# EAGLE board Homework#1 (EAGLE 7.6.0)

Size 73.58 x 63.39 mm. Coordinates in mm from the lower left corner, seen from the top.
Outline: 0,0 56.82,0 56.82,53.33 0,53.33 0,0
Copper layers (1*16): Top 0.035mm / dielectric 1.5mm / Bottom 0.035mm
Design rules "default": minimum track width 10mil, minimum drill 24mil, track to track 8mil, track to pad 8mil, pad to pad 8mil, via to via 8mil, smd to smd 8mil, copper to edge 40mil, drill to drill 8mil, minimum pad ring 10mil, minimum via ring 8mil, stop-mask expansion 4mil, vias tented up to drill 0mil, thermal gap 10mil

## Footprints (pad centres in the part's own frame; a part is rotated, then mirrored left to right if it is on the bottom)
LED5MM = drill 0.813 octagon: A -1.27,0; K 1.27,0
0207/10 = drill 0.813 octagon: 1 -5.08,0; 2 5.08,0
TL1105 = drill 1 pad 1.676: 1 -2.25,3.25; 2 2.25,3.25; 3 -2.25,-3.25; 4 2.25,-3.25
ARDUINO_UNO = drill 1.016 pad 1.88: 0 63.5,50.8; 1 60.96,50.8; 2 58.42,50.8; 3 55.88,50.8; 3.3V 35.56,2.54; 4 53.34,50.8; 5 50.8,50.8; 5V 38.1,2.54; 6 48.26,50.8; 7 45.72,50.8; 8 41.656,50.8; 9 39.116,50.8; 10 36.576,50.8; 11 34.036,50.8; 12 31.496,50.8; 13 28.956,50.8; A0 50.8,2.54; A1 53.34,2.54; A2 55.88,2.54; A3 58.42,2.54; A4 60.96,2.54; A5 63.5,2.54; AREF 23.876,50.8; GND 26.416,50.8; GND. 43.18,2.54; GND.. 40.64,2.54; I/OREF 30.48,2.54; N/C 27.94,2.54; RESET 33.02,2.54; SCL 18.796,50.8; SDA 21.336,50.8; VIN 45.72,2.54 | hole 3.2: 66.04,7.62; 66.04,35.56; 15.24,50.8; 13.97,2.54

## Placement (x,y rotation side)
D1  [LED5MM]  5,35.48 0 top
D2  [LED5MM]  5,149.78 0 top  (outside the outline)
D3  [LED5MM]  5,22.78 0 top
D4  [LED5MM]  5,200.58 0 top  (outside the outline)
D6  [LED5MM]  5,86.28 0 top  (outside the outline)
D7  [LED5MM]  5,810.18 0 top  (outside the outline)
D8  [LED5MM]  5,213.28 0 top  (outside the outline)
D9  [LED5MM]  5,98.98 0 top  (outside the outline)
D10  [LED5MM]  5,225.98 0 top  (outside the outline)
D10  [LED5MM]  5,225.98 0 top  (outside the outline)
D11  [LED5MM]  5,238.68 0 top  (outside the outline)
D12  [LED5MM]  5,251.38 0 top  (outside the outline)
D13  [LED5MM]  5,822.88 0 top  (outside the outline)
D14  [LED5MM]  5,695.88 0 top  (outside the outline)
D14  [LED5MM]  5,695.88 0 top  (outside the outline)
D15  [LED5MM]  5,429.18 0 top  (outside the outline)
D15  [LED5MM]  5,429.18 0 top  (outside the outline)
D16  [LED5MM]  5,137.08 0 top  (outside the outline)
D17  [LED5MM]  5,289.48 0 top  (outside the outline)
D18  [LED5MM]  5,302.18 0 top  (outside the outline)
D19  [LED5MM]  5,314.88 0 top  (outside the outline)
D20  [LED5MM]  5,327.58 0 top  (outside the outline)
D21  [LED5MM]  5,340.28 0 top  (outside the outline)
D22  [LED5MM]  5,352.98 0 top  (outside the outline)
D23  [LED5MM]  5,187.88 0 top  (outside the outline)
D24  [LED5MM]  5,162.48 0 top  (outside the outline)
D25  [LED5MM]  5,365.68 0 top  (outside the outline)
D27  [LED5MM]  5,378.38 0 top  (outside the outline)
D28  [LED5MM]  5,391.08 0 top  (outside the outline)
D29  [LED5MM]  5,403.78 0 top  (outside the outline)
D30  [LED5MM]  5,416.48 0 top  (outside the outline)
D31  [LED5MM]  5,441.88 0 top  (outside the outline)
D32  [LED5MM]  5,454.58 0 top  (outside the outline)
D33  [LED5MM]  5,467.28 0 top  (outside the outline)
D34  [LED5MM]  5,479.98 0 top  (outside the outline)
D35  [LED5MM]  5,492.68 0 top  (outside the outline)
D36  [LED5MM]  5,505.38 0 top  (outside the outline)
D37  [LED5MM]  5,518.08 0 top  (outside the outline)
D38  [LED5MM]  5,530.78 0 top  (outside the outline)
D39  [LED5MM]  5,543.48 0 top  (outside the outline)
D41  [LED5MM]  5,556.18 0 top  (outside the outline)
D42  [LED5MM]  5,568.88 0 top  (outside the outline)
D43  [LED5MM]  5,581.58 0 top  (outside the outline)
D44  [LED5MM]  5,594.28 0 top  (outside the outline)
D45  [LED5MM]  5,606.98 0 top  (outside the outline)
D51  [LED5MM]  5,619.68 0 top  (outside the outline)
D52  [LED5MM]  5,632.38 0 top  (outside the outline)
D53  [LED5MM]  5,645.08 0 top  (outside the outline)
D54  [LED5MM]  5,657.78 0 top  (outside the outline)
D55  [LED5MM]  5,670.48 0 top  (outside the outline)
D56  [LED5MM]  5,683.18 0 top  (outside the outline)
D57  [LED5MM]  5,708.58 0 top  (outside the outline)
D58  [LED5MM]  5,721.28 0 top  (outside the outline)
D59  [LED5MM]  5,733.98 0 top  (outside the outline)
D60  [LED5MM]  5,746.68 0 top  (outside the outline)
D61  [LED5MM]  5,759.38 0 top  (outside the outline)
D62  [LED5MM]  5,772.08 0 top  (outside the outline)
D63  [LED5MM]  5,784.78 0 top  (outside the outline)
D64  [LED5MM]  5,797.48 0 top  (outside the outline)
D65  [LED5MM]  5,835.58 0 top  (outside the outline)
D66  [LED5MM]  5,848.28 0 top  (outside the outline)
R1  220‎Ω  [0207/10]  5,48.18 0 top
R2  220‎Ω  [0207/10]  5,60.88 0 top
R3  220‎Ω  [0207/10]  5,175.18 0 top  (outside the outline)
R4  220‎Ω  [0207/10]  5,276.78 0 top  (outside the outline)
S3  [TL1105]  5,73.58 0 top  (outside the outline)
U1  [ARDUINO_UNO]  5,10.08 0 top

## Library data of the parts
D1-D4 D6-D10 D10-D14 D14 D15 D15-D25 D27-D39 D41-D45 D51-D66 R1-R4 S3 U1 = AUTODESK_CIRCUITS_BREADBOARD

## Nets
N$1: R2.2 S3.2 S3.4 U1.3
N$2: S3.1 S3.3 U1.5V
N$3: D1.A D2.A D3.A D4.A D6.A D7.A D8.A D9.A D10.A D11.A D13.A D14.A D15.A D16.A D24.A D56.A D57.A D61.A D62.A D63.A D64.A D65.A D66.A U1.13
N$4: D1.K D2.K D3.K D4.K D6.K D7.K D8.K D9.K D10.K D11.K D13.K D14.K D15.K D16.K D24.K D56.K D57.K D61.K D62.K D63.K D64.K D65.K D66.K R1.2
N$5: R1.1 R2.1 R3.1 R4.1 U1.GND..
N$6: D15.K D28.K D29.K D30.K D31.K D32.K D33.K D34.K D35.K D36.K D37.K D38.K D39.K D41.K D42.K D43.K R4.2
N$7: D15.A D28.A D29.A D30.A D31.A D32.A D33.A D34.A D35.A D36.A D37.A D38.A D39.A D41.A D42.A D43.A U1.11
N$8: D12.K D14.K D17.K D18.K D19.K D20.K D21.K D22.K D23.K D25.K D27.K D44.K D45.K D51.K D52.K D53.K D54.K D55.K D58.K D59.K D60.K R3.2
N$9: D12.A D14.A D17.A D18.A D19.A D20.A D21.A D22.A D23.A D25.A D27.A D44.A D45.A D51.A D52.A D53.A D54.A D55.A D58.A D59.A D60.A U1.12

## Tracks (layer width: path | path; a pad name or v marks a point on that pad's centre or on a via)
N$1  (3 unrouted)
N$2  (2 unrouted)
N$3  (24 unrouted)
N$4  (24 unrouted)
N$5  (4 unrouted)
N$6  (16 unrouted)
N$7  (16 unrouted)
N$8  (21 unrouted)
N$9  (21 unrouted)